# Altium PCB DM35_Power_C_V2.0.PcbDoc
Units mm, origin at the board's own origin, x right, y up, seen from the top; angles counter-clockwise.
Board outline 30 x 20 mm, 2 copper layers (Top Layer, Bottom Layer), stack 1.511 mm thick; 7 components, 4 nets, 28 pads, 201 vias.
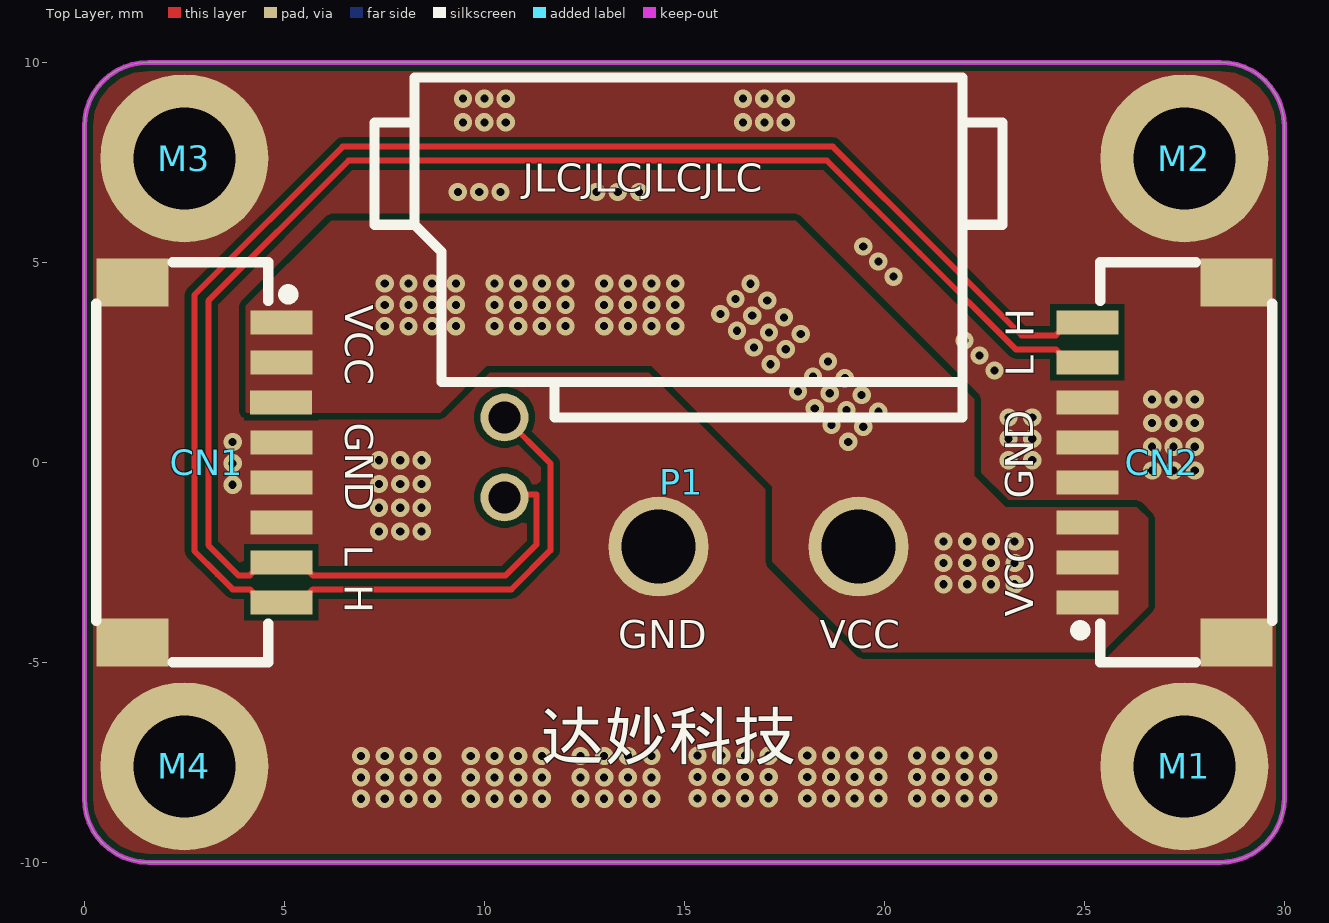
[diagram p0: Top Layer view]
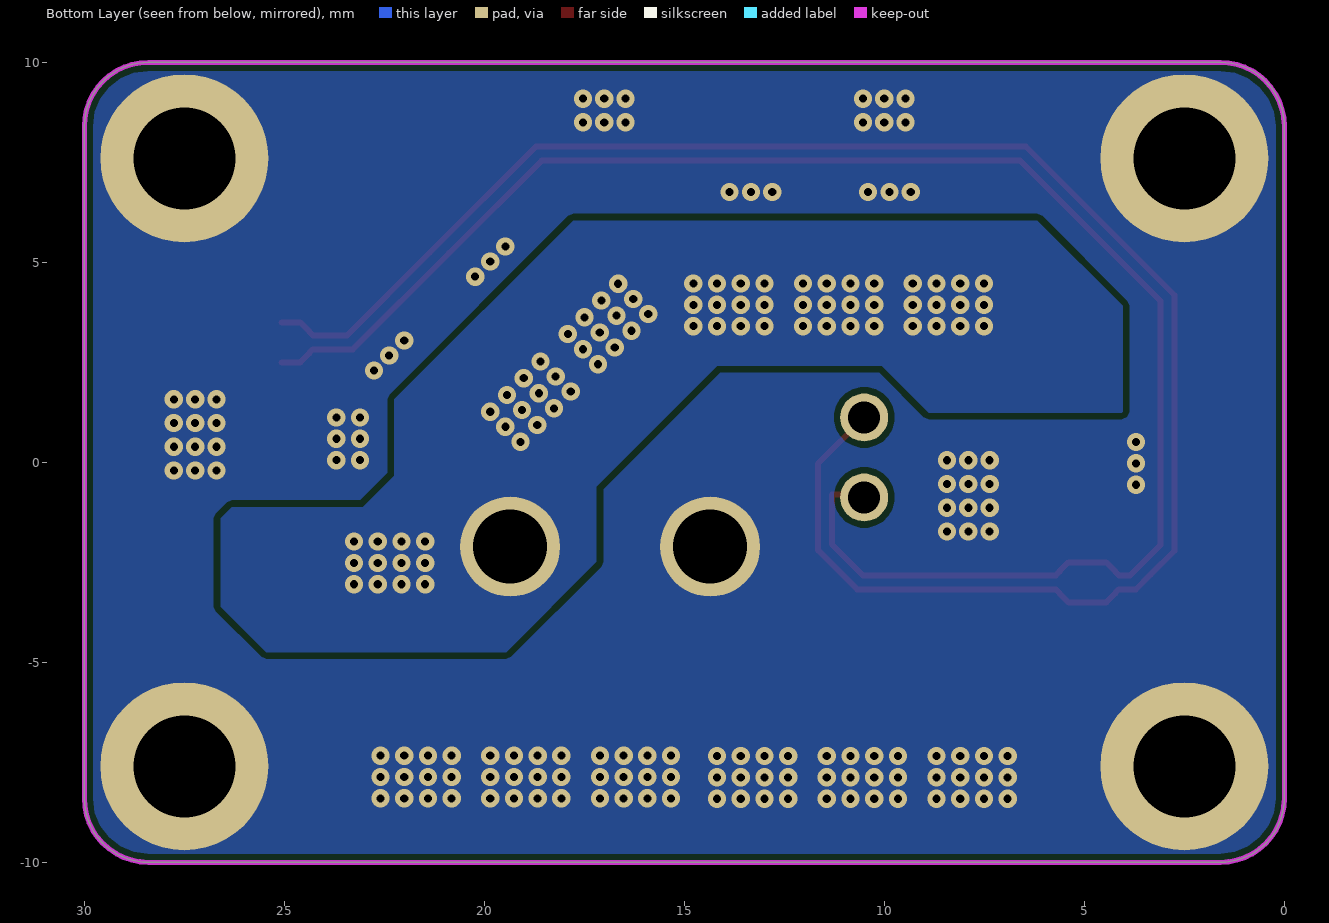
[diagram p1: Bottom Layer view, seen from below]
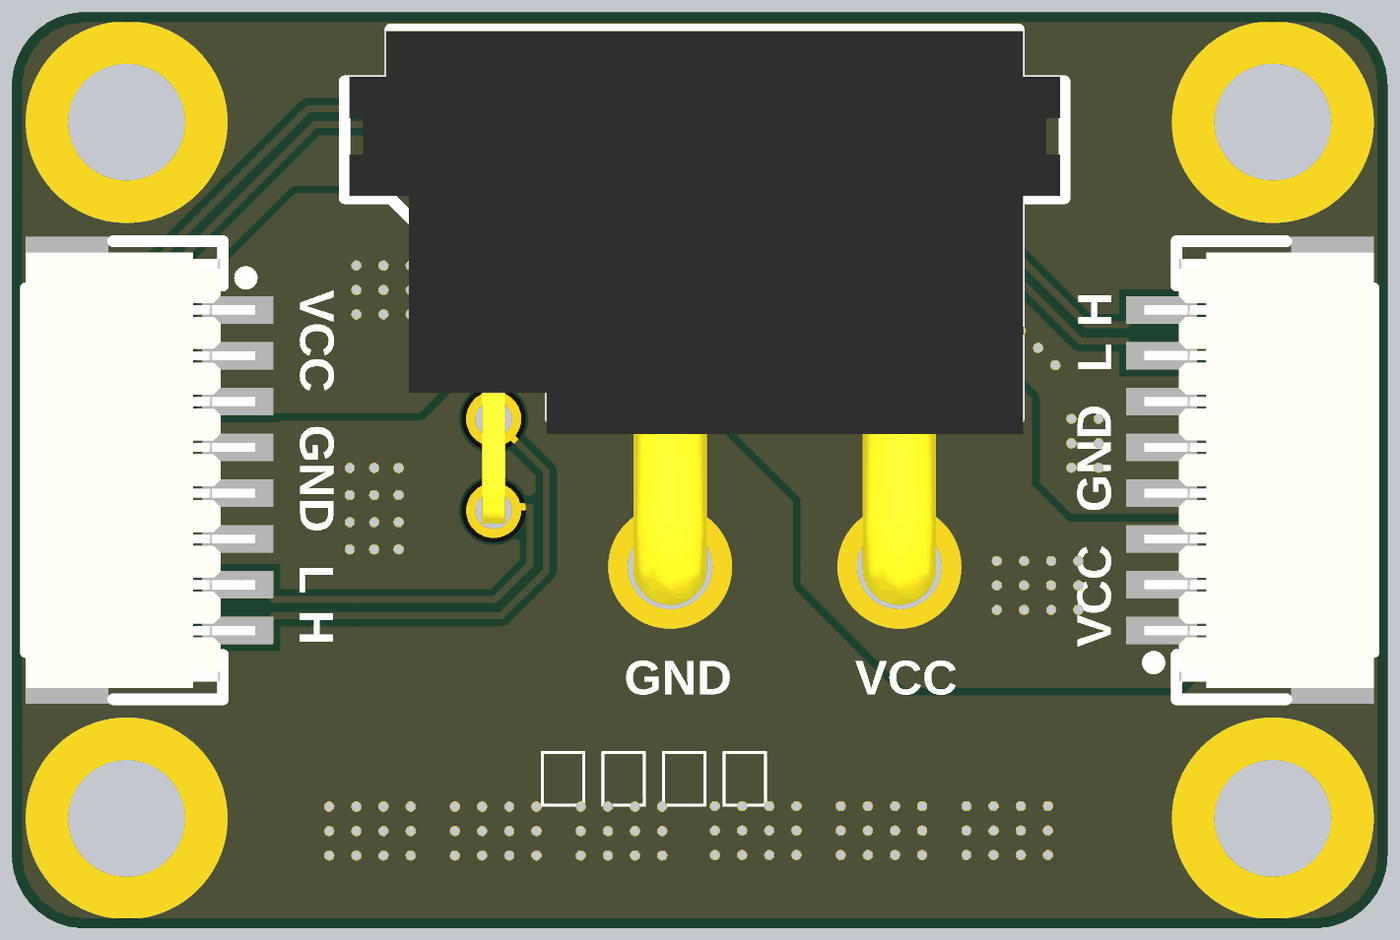
[diagram p2: 3D render of the assembled board from above, using the file's embedded part models]

## Layer stack, top to bottom
Top Solder: solder mask 0.0102, Solder Resist, Dk 3.5
Top Layer: signal copper 0.0356
Dielectric1: core 0.8, FR-4, Dk 4.8
Dielectric2: prepreg 0.32, FR-4, Dk 4.8
Dielectric3: core 0.32, FR-4, Dk 4.8
Bottom Layer: signal copper 0.0356
Bottom Solder: solder mask 0.0102, Solder Resist, Dk 3.5

## Board outline
1.6,-10 cw(c1.6,-8.4) 0,-8.4 0,8.4 cw(c1.6,8.4) 1.6,10 28.4,10 cw(c28.4,8.4) 30,8.4 30,-8.4 cw(c28.4,-8.4) 28.4,-10

## Design rules (kind name [scope] priority, off if disabled: settings)
Clearance Clearance_1 [InNet('GND') OR InNet('VCC')OR InNet('VCC_24V_Relay')  OR InNet('NetC1_2')       OR InNet('NetD1_1') vs InNet('GND') OR InNet('VCC')OR InNet('VCC_24V_Relay')  OR InNet('NetC1_2')    OR InNet('NetD1_1')] p1: gap=0.305 ignorepadtopadclearanceinfootprint=FALSE
Clearance [InNet('GND') vs InNet('VCC_IN')OR InNet('VCC_12V')OR InNet('VCC_Battery_Charge')OR   InNet('VCC_Hand')OR  InNet('VCC_Auto') OR  InNet('VCC_MOTOR')   OR  InNet('NetU9_5') OR  InNet('VCC_12V_Relay')] p2: gap=0.406 ignorepadtopadclearanceinfootprint=FALSE except(0: Arc-Hole Track-Hole SMDPad-Hole THPad-Hole Via-Hole Fill-Hole Poly-Hole Region-Hole Text-Hole)
Clearance BAT [InNet('BAT-')] p3: gap=0.305 ignorepadtopadclearanceinfootprint=FALSE except(0: Arc-Hole Track-Hole SMDPad-Hole THPad-Hole Via-Hole Fill-Hole Poly-Hole Region-Hole Text-Hole)
Clearance NET_C32 [InNet('NetC23_2')] p4: gap=0.152 ignorepadtopadclearanceinfootprint=FALSE except(0: Arc-Hole Track-Hole SMDPad-Hole THPad-Hole Via-Hole Fill-Hole Poly-Hole Region-Hole Text-Hole)
Clearance ALL [All] p5: gap=0.152 ignorepadtopadclearanceinfootprint=FALSE except(0: Arc-Hole Track-Hole SMDPad-Hole THPad-Hole Via-Hole Fill-Hole Poly-Hole Region-Hole Text-Hole)
ComponentClearance [All] p1: gap=0 collisioncheckmode=3 verticalgap=0 showdistances=FALSE
DiffPairsRouting [All] p1: maxlimit=0.254 minlimit=0.2 mostfreqgap=0.2 toplayer_minwidth=0.15 toplayer_maxwidth=0.381 toplayer_prefwidth=0.15 bottomlayer_minwidth=0.15 bottomlayer_maxwidth=0.381 bottomlayer_prefwidth=0.15 maxuncoupledlength=12.7
Height [All] p1: minheight=0 maxheight=254 prefheight=12.7
PlaneConnect [All] p1: planeconnectstyle=Direct reliefexpansion=0.508 reliefentries=4 reliefconductorwidth=0.254 reliefairgap=0.254
PolygonConnect [All] p1: connectstyle=Direct reliefconductorwidth=0.254 reliefentries=4 polygonreliefangle="90 Angle" airgapwidth=0.254
RoutingVias [All] p1: holewidth=0.711 width=1.27 viastyle="Through Hole" minholewidth=0.203 minwidth=0.457 maxholewidth=0.711 maxwidth=5.08
SolderMaskExpansion [All] p1: expansion=0.102 istentingtop=FALSE
SupplyNets "Schematic Supply Nets_1" [InNet('GND')] p1: voltage=0.000
SupplyNets "Schematic Supply Nets" [InNet('VCC24V')] p2: voltage=0.000
Width [All] p1: maxlimit=2.54 minlimit=0.102 preferedwidth=0.254
26 further rules are at their usual default settings.

## Classes and differential pairs
differential pair NewDifferentialPair1: +CAN_H -CAN_L

## Components (designator, comment, footprint, x,y, rotation, side; value= is the part's Value field where it differs from the comment)
CN1 "A1002WR-S-8P" CONN-SMD_A1002WR-S-8P 3,0 r270 top locked
CN2 "A1002WR-S-8P" CONN-SMD_A1002WR-S-8P 27,0 r90 top locked
M1 "M2" HOLE_PC4DC2P4 27.5,-7.6 r0 top locked
M2 "M2" HOLE_PC4DC2P4 27.5,7.6 r0 top locked
M3 "M2" HOLE_PC4DC2P4 2.5,7.6 r0 top locked
M4 "M2" HOLE_PC4DC2P4 2.5,-7.6 r0 top locked
P1 "XT30PW-M (2+2)" "XT30PW-M (2+2)" 14.355,-2.108 r0 top locked

## Footprints (in the part's own frame and the unit in brackets; to place one, negate y for a bottom-side part, rotate by r counter-clockwise, add the part's x,y. Pads: shape width x height; smd on the part's side, far side on the other; paste and mask are expansions set on the pad)
CONN-SMD_A1002WR-S-8P [mm]
  rect 0.6x1.55 smd mask+0: 1(-3.5,1.924) 2(-2.5,1.924) 3(-1.5,1.922) 4(-0.5,1.924) 5(0.5,1.924) 6(1.5,1.924) 7(2.5,1.924) 8(3.5,1.924)
  rect 1.2x1.8 smd mask+0: 9(4.5,-1.8) 10(-4.5,-1.8)
  silkscreen extent -5,-2.7 5,2.23, body extent -4.75,-2.7 4.75,2.3, height 2.45
HOLE_PC4DC2P4 [mm]
  round 4.2 hole 2.55: 0(0,0)
"XT30PW-M (2+2)" [mm]
  round 2.5 hole 1.85: 1(0,0) 2(5,0)
  round 1.2 hole 0.8: 3(-3.85,1.23) 4(-3.85,3.23)
  silkscreen extent -7.1,3.23 8.6,11.73, body extent -7,-0.83 8.5,11.7, height 5.2

## Part data
CN1 CN2: JLCPCB Part Class="Extended Part", LCSC Part Name=8P,脚距1mm, Manufacturer=CJT(长江连接器), Add into BOM=yes, Connector Type=接头, Contact Material=磷青铜, Contact Type=公形引脚, Convert to PCB=yes, Datasheet=https://atta.szlcsc.com/upload/public/pdf/watermark/20190926/C239526_E6EB898D74B3D7AFB647860A542281E4.pdf, Device=A1002WR-S-8P, Manufacturer Part=A1002WR-S-8P, Mounting Type=表面贴装, Name=A1002WR-S-8P, Number of Positions=8, Number of Rows=1, Pitch="0.039\"(1.00mm)", Row Spacing=-, Series=SH, Supplier=LCSC, Supplier Footprint=SMD,P=1mm, Supplier Part=C239526, Symbol=A1002WR-S-8P
M1 M2 M3 M4: library part Hole-M2.5
P1: library part "Header 4", LatestRevisionDate=17-Jul-2002, LatestRevisionNote="Re-released for DXP Platform.", Publisher="Altium Limited"

## Via types
v1: diameter 0.457, hole 0.203, Top Layer to Bottom Layer, tented both sides, 201 vias

## Nets (pads, with @x,y where several pads share a name; then routed paths per layer and width w, separated by ;. In a path a pad name is that pad's centre, name@x,y a point inside that pad or via, vN(x,y) a via of type N, cw(c..) or ccw(c..) an arc to the next point about the centre after c; other vN are vias at no path point)
CAN_H: CN1.8 CN2.8 P1.4 | length 46.1
  Top Layer w0.15: P1.4 11.653,-0.026 11.653,-2.202 10.68,-3.175 5.712,-3.175 5.624,-3.263 5.624,-3.275 5.399,-3.5 CN1.8 4.449,-3.5 4.224,-3.275 4.224,-3.263 4.137,-3.175 3.708,-3.175 3.335,-2.802 2.749,-2.216 2.749,4.184 6.459,7.894 18.712,7.894 21.374,5.232 23.431,3.175 24.288,3.175 24.376,3.263 24.376,3.275 24.601,3.5 CN2.8
CAN_L: CN1.7 CN2.7 P1.3 | length 42.8
  Top Layer w0.15: P1.3 10.583,-0.8 11.303,-0.8 11.303,-2.057 10.535,-2.825 5.712,-2.825 5.624,-2.738 5.624,-2.725 5.399,-2.5 CN1.7 4.449,-2.5 4.224,-2.725 4.224,-2.738 4.137,-2.825 3.853,-2.825 3.099,-2.071 3.099,4.039 6.604,7.544 18.567,7.544 20.879,5.232 23.286,2.825 24.288,2.825 24.376,2.738 24.376,2.725 24.601,2.5 CN2.7
GND: CN1.4 CN1.5 CN1.6 CN1.9 CN1.10 CN2.4 CN2.5 CN2.6 CN2.9 CN2.10 M1.0 M2.0 M3.0 M4.0 P1.1
  other v1: 6.917,-8.41 7.51,-8.41 8.103,-8.41 8.695,-8.41 9.66,-8.41 10.253,-8.41 10.846,-8.41 11.438,-8.41 12.404,-8.41 12.996,-8.41 13.589,-8.41 14.182,-8.41 15.331,-8.4 15.923,-8.4 16.516,-8.4 17.109,-8.4 18.074,-8.4 18.666,-8.4 19.259,-8.4 19.852,-8.4 20.817,-8.4 21.41,-8.4 22.002,-8.4 22.595,-8.4 6.917,-7.877 7.51,-7.877 8.103,-7.877 8.695,-7.877 9.66,-7.877 10.253,-7.877 10.846,-7.877 11.438,-7.877 12.404,-7.877 12.996,-7.877 13.589,-7.877 14.182,-7.877 15.331,-7.867 15.923,-7.867 16.516,-7.867 17.109,-7.867 18.074,-7.867 18.666,-7.867 19.259,-7.867 19.852,-7.867 20.817,-7.867 21.41,-7.867 22.002,-7.867 22.595,-7.867 6.917,-7.343 7.51,-7.343 8.103,-7.343 8.695,-7.343 9.66,-7.343 10.253,-7.343 10.846,-7.343 11.438,-7.343 12.404,-7.343 12.996,-7.343 13.589,-7.343 14.182,-7.343 15.331,-7.333 15.923,-7.333 16.516,-7.333 17.109,-7.333 18.074,-7.333 18.666,-7.333 19.259,-7.333 19.852,-7.333 20.817,-7.333 21.41,-7.333 22.002,-7.333 22.595,-7.333 7.366,-1.727 7.899,-1.727 8.433,-1.727 7.366,-1.135 7.899,-1.135 8.433,-1.135 3.708,-0.56 7.366,-0.542 7.899,-0.542 8.433,-0.542 26.695,-0.203 27.229,-0.203 27.762,-0.203 3.708,-0.027 7.366,0.051 7.899,0.051 8.433,0.051 23.106,0.055 23.699,0.055 26.695,0.389 27.229,0.389 27.762,0.389 3.708,0.507 23.106,0.588 23.699,0.588 26.695,0.982 27.229,0.982 27.762,0.982 23.106,1.122 23.699,1.122 26.695,1.575 27.229,1.575 27.762,1.575 22.757,2.294 22.379,2.671 22.002,3.048 20.229,4.642 19.852,5.019 19.475,5.396 9.339,6.756 9.872,6.756 10.406,6.756 12.802,6.756 13.335,6.756 13.868,6.756 9.468,8.499 10.002,8.499 10.535,8.499 16.468,8.499 17.001,8.499 17.535,8.499 9.468,9.092 10.002,9.092 10.535,9.092 16.468,9.092 17.001,9.092 17.535,9.092
VCC24V: CN1.1 CN1.2 CN1.3 CN2.1 CN2.2 CN2.3 P1.2
  other v1: 21.48,-3.048 22.073,-3.048 22.665,-3.048 23.258,-3.048 21.48,-2.515 22.073,-2.515 22.665,-2.515 23.258,-2.515 21.48,-1.981 22.073,-1.981 22.665,-1.981 23.258,-1.981 19.097,0.511 19.475,0.889 18.678,0.93 19.852,1.266 19.056,1.308 18.259,1.35 19.433,1.685 18.636,1.727 17.84,1.769 19.014,2.104 18.217,2.146 17.158,2.451 18.595,2.523 17.535,2.828 16.739,2.87 17.912,3.205 17.116,3.247 16.32,3.289 7.51,3.404 8.103,3.404 8.695,3.404 9.288,3.404 10.253,3.404 10.846,3.404 11.438,3.404 12.031,3.404 12.996,3.404 13.589,3.404 14.182,3.404 14.774,3.404 17.493,3.625 16.697,3.666 15.9,3.708 7.51,3.937 8.103,3.937 8.695,3.937 9.288,3.937 10.253,3.937 10.846,3.937 11.438,3.937 12.031,3.937 12.996,3.937 13.589,3.937 14.182,3.937 14.774,3.937 17.074,4.044 16.278,4.086 16.655,4.463 7.51,4.47 8.103,4.47 8.695,4.47 9.288,4.47 10.253,4.47 10.846,4.47 11.438,4.47 12.031,4.47 12.996,4.47 13.589,4.47 14.182,4.47 14.774,4.47

## Polygon pours and split planes (outlines as drawn)
GND on Top Layer "NONET_L01_P-001" (solid, pour order 7): 1.6,-10 cw(c1.6,-8.4) 0,-8.4 0,8.4 cw(c1.6,8.4) 1.6,10 28.4,10 cw(c28.4,8.4) 30,8.4 30,-8.4 cw(c28.4,-8.4) 28.4,-10
VCC24V on Top Layer "NONET_L01_P-001" (solid, pour order 5): 4.039,1.27 4.039,3.912 6.172,6.045 17.78,6.045 22.25,1.575 22.25,-0.33 23.038,-1.118 26.314,-1.118 26.594,-1.397 26.594,-3.607 25.451,-4.75 19.456,-4.75 17.196,-2.489 17.196,-0.61 14.173,2.413 10.062,2.413 8.893,1.245 4.064,1.245
GND on Bottom Layer "NONET_L01_P-001" (solid, pour order 8): 1.6,-10 cw(c1.6,-8.4) 0,-8.4 0,8.4 cw(c1.6,8.4) 1.6,10 28.4,10 cw(c28.4,8.4) 30,8.4 30,-8.4 cw(c28.4,-8.4) 28.4,-10
VCC24V on Bottom Layer "NONET_L01_P-001" (solid, pour order 6): 4.039,1.27 4.039,3.912 6.172,6.045 17.78,6.045 22.25,1.575 22.25,-0.33 23.038,-1.118 26.314,-1.118 26.594,-1.397 26.594,-3.607 25.451,-4.75 19.456,-4.75 17.196,-2.489 17.196,-0.61 14.173,2.413 10.062,2.413 8.893,1.245 4.064,1.245

## Keep-outs
Keep-Out Layer:
  the board outline again, w0.127

## Silkscreen, mask and mechanical layers (free items; w line width, h text height)
Top Overlay:
  text "JLCJLCJLCJLC" at 10.96,6.529 h1.2
  text "VCC" at 6.286,3.937 h1.2 r270
  text "H" at 23.979,3.124 h1.2 r90
  text "L" at 23.979,2.134 h1.2 r90
  text "GND" at 6.286,0.99 h1.2 r270
  text "GND" at 23.966,-0.913 h1.2 r90
  text "L" at 6.272,-2.057 h1.2 r270
  text "H" at 6.272,-3.048 h1.2 r270
  text "VCC" at 23.966,-3.861 h1.2 r90
  text "GND" at 13.351,-4.891 h1.2
  text "VCC" at 18.386,-4.891 h1.2
  text "达妙科技" at 11.405,-7.798 h2
Mechanical 1:
  the board outline again, w0.127